# Altium PCB louderspker_pcb_ver1.1.PcbDoc
Units mil, origin at the board's own origin, x right, y up, seen from the top; angles counter-clockwise.
Board outline 2170 x 1830 mil, 2 copper layers (Top Layer, Bottom Layer); 27 components, 16 nets, 65 pads, 6 vias.
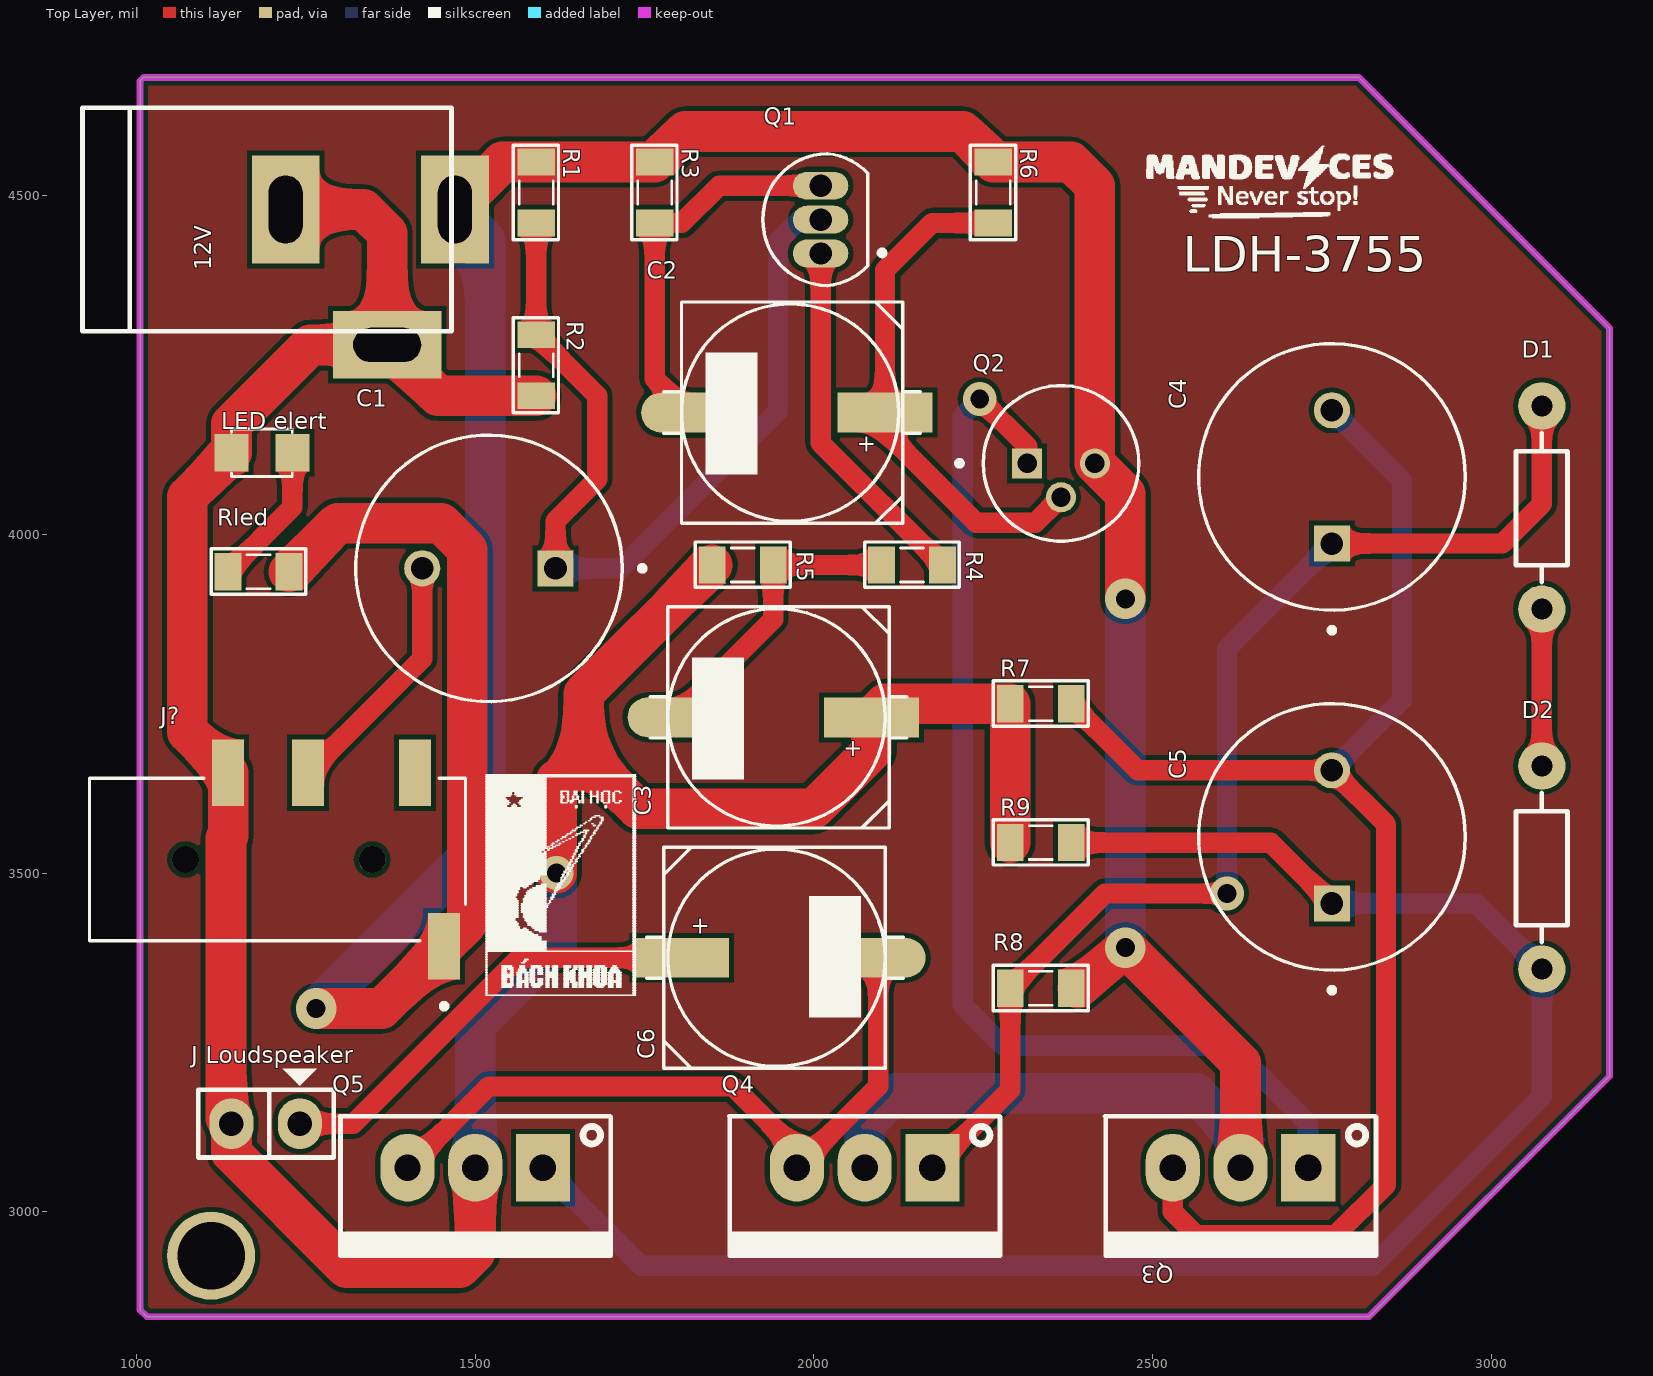
[diagram p0: Top Layer view]
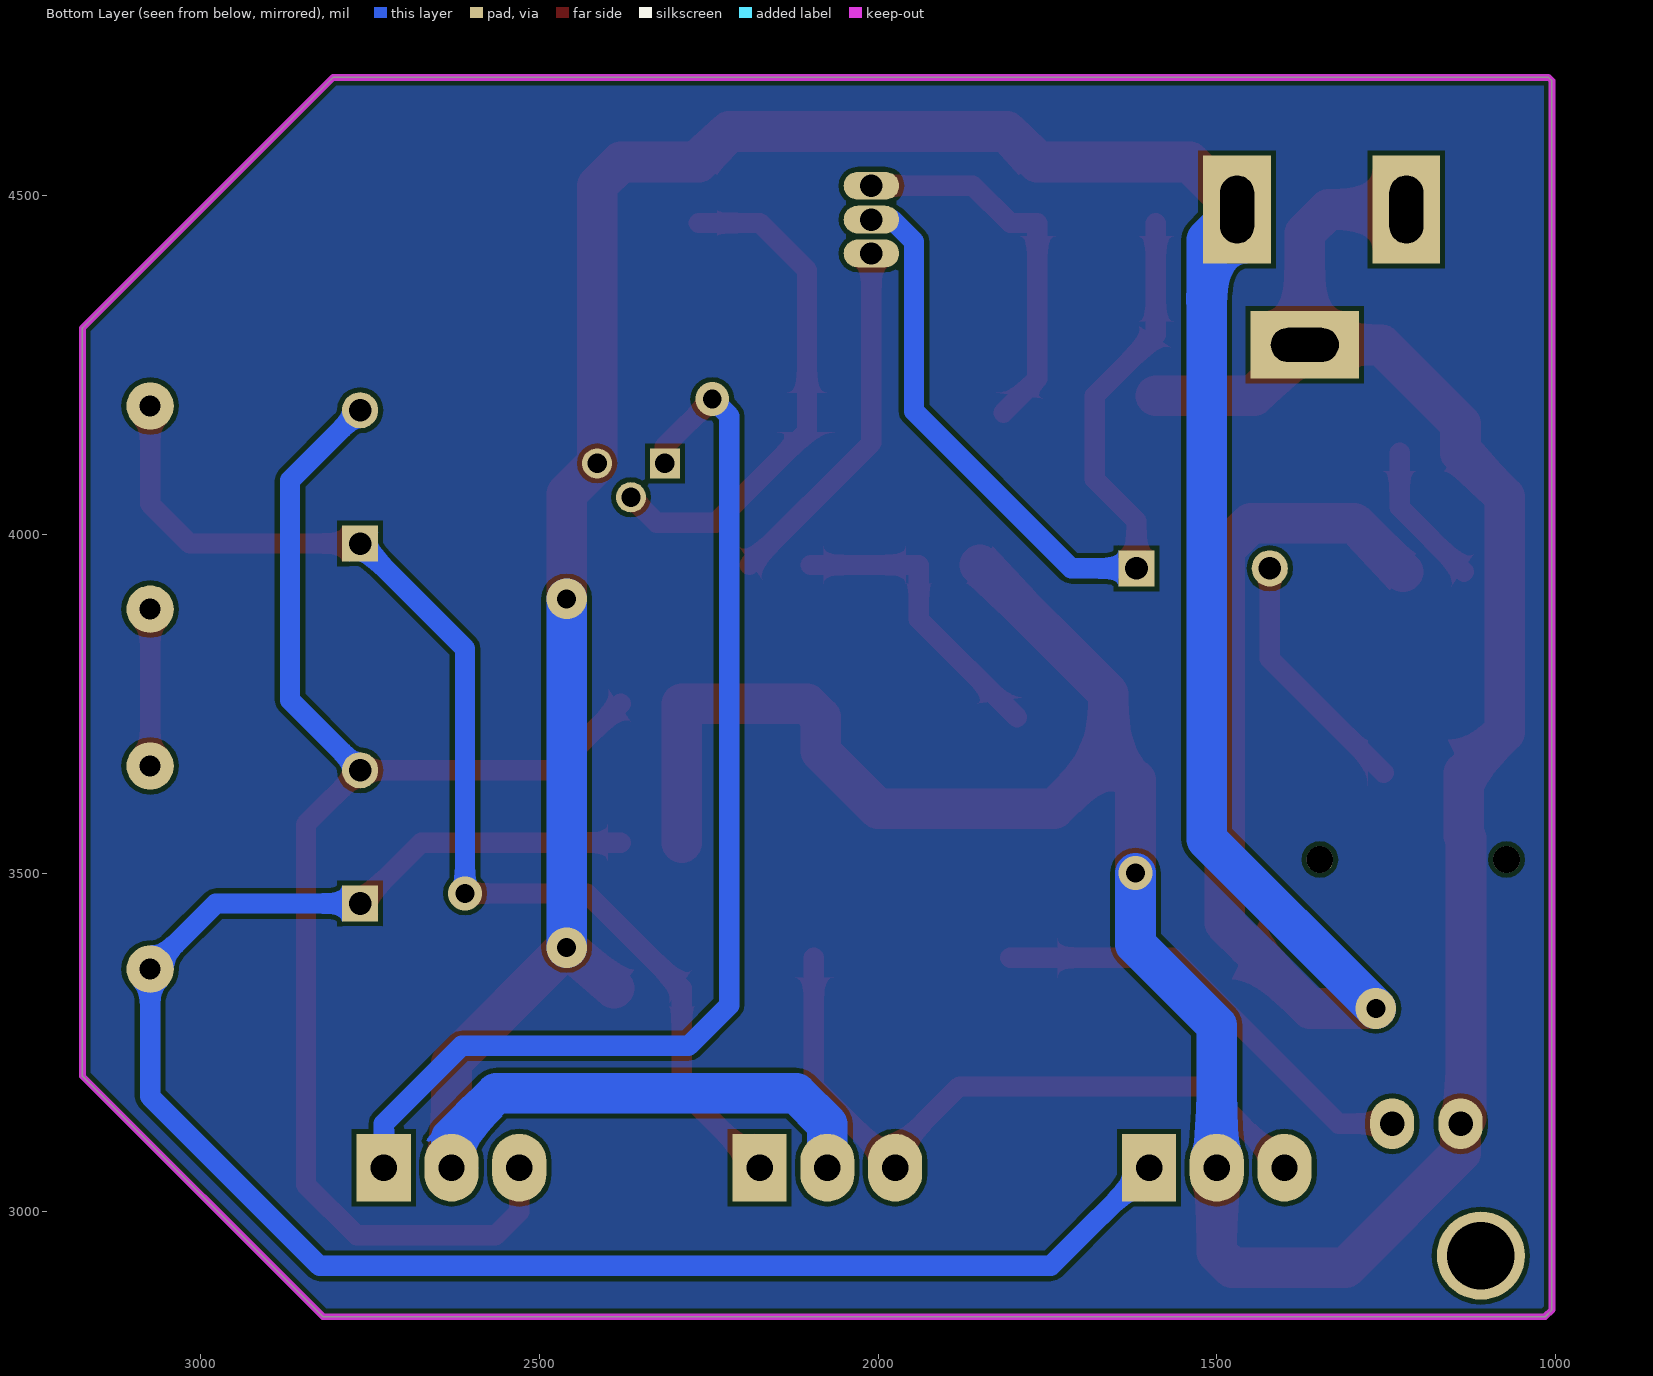
[diagram p1: Bottom Layer view, seen from below]
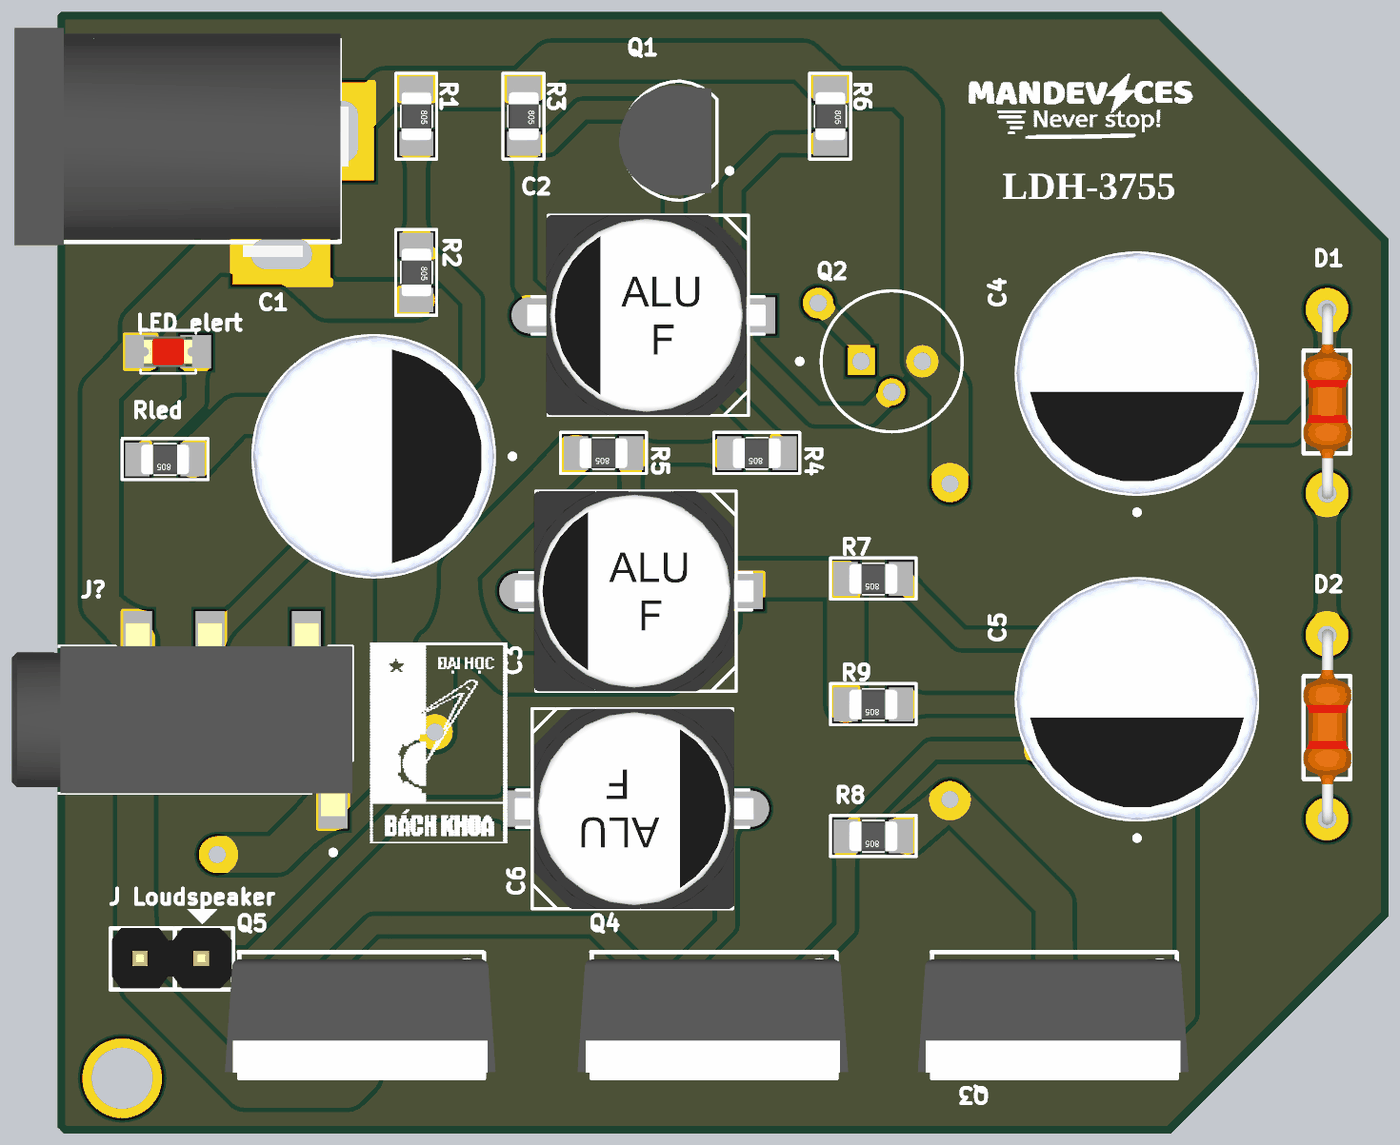
[diagram p2: 3D render of the assembled board from above, using the file's embedded part models]

## Layer stack, top to bottom
Top Solder: solder mask 0.4, Solder Resist, Dk 3.5
Top Layer: signal copper 1.4
Dielectric 1: dielectric 12.6, FR-4, Dk 4.8
Bottom Layer: signal copper 1.4
Bottom Solder: solder mask 0.4, Solder Resist, Dk 3.5

## Board outline
1015,2845 1005,2855 1005,4670 1010,4675 2805,4675 3045,4435 3175,4305 3175,3200 2820,2845

## Design rules (kind name [scope] priority, off if disabled: settings)
Clearance [All] p1: gap=7 ignorepadtopadclearanceinfootprint=TRUE
PolygonConnect [All] p1: connectstyle=Relief reliefconductorwidth=10 reliefentries=4 polygonreliefangle="90 Angle" airgapwidth=10
RoutingVias [All] p1: holewidth=28 width=50 viastyle="Through Hole" minholewidth=28 minwidth=50 maxholewidth=28 maxwidth=50
SolderMaskExpansion [All] p1: expansion=4
Width [All] p1: maxlimit=60 minlimit=20 preferedwidth=30
30 further rules are at their usual default settings.

## Components (designator, comment, footprint, x,y, rotation, side; value= is the part's Value field where it differs from the comment)
12V "Jac DC" DC-IN 1345,4380 r0 top
C1 "CAP-ALU-DIP" CAPPRD500W60D1000H1050 1520.18,3950 r180 top value=104
C2 "CN-ALU-SMD" CAP-ALU-SMD-F 1965,4180 r180 top
C3 "CN-ALU-SMD" CAP-ALU-SMD-F 1945,3730 r180 top
C4 "CAP-ALU-DIP" CAPPRD500W60D1000H1050 2765,4085 r90 top value=104
C5 "CAP-ALU-DIP" CAPPRD500W60D1000H1050 2765,3553.43 r90 top value=104
C6 "CN-ALU-SMD" CAP-ALU-SMD-F 1945,3375 r0 top
D1 "1N4148" RES-1/8W 3075,4034.75 r90 top value="R1/4W - 1K"
D2 "1N4148" RES-1/8W 3075,3503.17 r90 top value="R1/4W - 1K"
"J Loudspeaker" "Jumper 2" JP2 1241,3130 r180 top value="JP 2"
J? "PJ-320D-A" HRO_PJ-320D-A 1210,3520 r0 top
"LED elert" "LED" LED-0805-Red 1230,4120.68 r180 top value="LED 3 ly Single Colour"
Q1 "2N3904" TO92127P495H495-3 2010,4465 r90 top
Q2 "2N2222A" TO127P584H533-3 2365,4105 r0 top
Q3 "TIP41C" QTO-220 2730,3065 r180 top
Q4 "TIP41C" QTO-220 2175,3065 r180 top
Q5 "TIP42C" QTO-220 1600,3065 r180 top
R1 "" RES-SMD-0805 1590,4505 r270 top
R2 "Resistor - SMD" RES-SMD-0805 1590,4250 r270 top
R3 "Resistor - SMD" RES-SMD-0805 1765,4505 r270 top
R4 "Resistor - SMD" RES-SMD-0805 2145,3955 r180 top
R5 "Resistor - SMD" RES-SMD-0805 1895,3955 r180 top
R6 "270k Ohm" RES-SMD-0805 2265,4505 r270 top
R7 "Resistor - SMD" RES-SMD-0805 2335,3750 r180 top
R8 "Resistor - SMD" RES-SMD-0805 2335,3330 r180 top
R9 "Resistor - SMD" RES-SMD-0805 2335,3545 r180 top
Rled "800 Ohm" RES-SMD-0805 1180,3945 r180 top

## Footprints (in the part's own frame and the unit in brackets; to place one, negate y for a bottom-side part, rotate by r counter-clockwise, add the part's x,y. Pads: shape width x height; smd on the part's side, far side on the other; paste and mask are expansions set on the pad)
CAP-ALU-SMD-F [mil]
  rect 140x59.06 smd: 1(-140,0)
  oval 140x59.06 smd: 2(150,0)
  silkscreen extent -192,-163 187,163, body extent -195,-163 195,163, height 402
CAPPRD500W60D1000H1050 [mm]
  rect 1.358x1.358 / inner round 1.358 / far side rect 1.358x1.358 hole 0.85: 1(-2.5,0)
  round 1.358 hole 0.85: 2(2.5,0)
  silkscreen extent -5.85,-5 5,5, body extent -5,-5 5,5, height 9.5
DC-IN [mil]
  rect 100x160 hole 50 slot 100 at 90 deg: 1(125,100) 2(-125,100)
  rect 160x100 hole 50 slot 100 at 0 deg: 3(25,-100)
  silkscreen extent -425,-80 120,250, body extent -410,-105 134,269, height 434
HRO_PJ-320D-A [mm]
  rect 1.2x2.5 smd: 1(6.2,-3.25) 2(5.1,3.25) 3(1.1,3.25) 4(-1.9,3.25)
  round 1 hole 1 unplated: ""(-3.5,0) ""(3.5,0)
  silkscreen extent -7.1,-5.6 7,3.05, body extent -7.1,-4 7,4, height 5.3
JP2 [mil]
  oval 65x75 hole 36: 1(0,0) 2(101,0)
  silkscreen extent -50,-81 150,50, body extent -48,-50 148,48, height 323
LED-0805-Red [mil]
  rect 50x55 smd: 1(0,0) 2(90,0)
  silkscreen extent 0,-35 90,35, body extent 5,-25 85,25, height 43
QTO-220 [mil]
  rect 80x100 hole 39: 1(0,0)
  oval 80x100 hole 39: 2(100,0) 3(200,0)
  silkscreen extent -100,-76 300,130, body extent -119,-64 322,121, height 755
RES-1/8W [mil]
  round 70 hole 31: 1(-145,0) 2(155,0)
  silkscreen extent -105,-38 115,38, body extent -154,-40 164,39, height 79
RES-SMD-0805 [mil]
  rect 39.37x55 smd: 1(-45,0) 2(45,0)
  silkscreen extent -70,-34 70,33, body extent -39,-25 39,25, height 31
TO127P584H533-3 [mm]
  rect 1.13x1.13 hole 0.73: 1(-1.27,0)
  round 1.13 hole 0.73: 2(0,-1.27) 3(1.27,0)
  silkscreen extent -3.91,-2.92 2.92,2.92
TO92127P495H495-3 [mm]
  oval 1.04x2.08 hole 0.84: 1(-1.27,0) 2(0,0) 3(1.27,0)
  silkscreen extent -2.48,-2.4 2.48,2.16, body extent -2.28,-1.55 2.28,2.28, height 20.44

## Part data
12V: library part DCIN, "Jac DC input"
C1 C4 C5: "Capacitor (Semiconductor SIM Model)", LatestRevisionDate=17-Jul-2002, LatestRevisionNote="Re-released for DXP Platform.", PackageReference=C1206, Publisher="Altium Limited"
C2 C3 C6: library part CAP-ALU-SMD, "Polarized Capacitor (Axial)", LatestRevisionDate=17-Jul-2002, LatestRevisionNote="Re-released for DXP Platform.", PackageReference=POLAR0.8, Published=8-Jun-2000, Publisher="Altium Limited"
D1 D2: library part "Resistor - DIP", "Resistor - DIP"
"J Loudspeaker": library part "JP 2"
J?: "Headphone jack 0.5A 30V DC 100 mΩ", Package=Package, Availability="Not in stock", Check_prices=https://www.snapeda.com/parts/PJ-320D-A/HRO+Electronics+Co.%252C+Ltd./view-part/?ref=eda, MF="HRO Electronics Co., Ltd.", MP=PJ-320D-A, Price=None, SnapEDA_Link=https://www.snapeda.com/parts/PJ-320D-A/HRO+Electronics+Co.%252C+Ltd./view-part/?ref=snap
"LED elert": "LED Single colour Green and Red"
Q1: "TRANS NPN 40V 200MA TO92-3", Package="TO-226-3 Rectron", Availability="In Stock", Check_prices=https://www.snapeda.com/parts/2N3904/Rectron/view-part/?ref=eda, MF=Rectron, MP=2N3904, Price=None, Purchase-URL=https://pricing.snapeda.com/search/part/2N3904/?ref=eda, SnapEDA_Link=https://www.snapeda.com/parts/2N3904/Rectron/view-part/?ref=snap
Q2: "2N2222A 50 V 800 mA NPN Silicon Switching Transistor - TO-18 (TO-206AA)", Package=None, Availability=Unavailable, MP=2N2222A, Price=None
Q3 Q4: "NPN 2W, BCE", =H1061
Q5: "PNP 2W, BCE", =A671
R1 R6 Rled: library part "Resistor - SMD", "Resistor SMD", Manufacturer="Generic Components", Class=Passive, Published=08/06/2000, Publisher="Altium Hobart Technology Centre"
R2 R3 R4 R5 R7 R8 R9: "Resistor SMD", Manufacturer="Generic Components", Class=Passive, Published=08/06/2000, Publisher="Altium Hobart Technology Centre"

## Free pads (board coordinates)
  round 130 hole 100: 2(1110,2935)

## Via types
v1: diameter 50, hole 28, Top Layer to Bottom Layer, 3 vias
v2: diameter 60, hole 28, Top Layer to Bottom Layer, 3 vias

## Nets (pads, with @x,y where several pads share a name; then routed paths per layer and width w, separated by ;. In a path a pad name is that pad's centre, name@x,y a point inside that pad or via, vN(x,y) a via of type N, cw(c..) or ccw(c..) an arc to the next point about the centre after c; other vN are vias at no path point)
+12: 12V.1 J?.1 Q2.3 Q3.2 Q4.2 R1.1 R3.1 R6.1 R8.1 Rled.1 | length 5815
  Top Layer w30: R8.1 R8.1@2390,3330
  Top Layer w60: Rled.1 1296.73,4016.73 1449.39,4016.73 1488.48,3977.64 1488.48,3426.44 J?.1 1362.05,3300 v2(1265,3300) ; 12V.1 1540,4550 R1.1 R3.1 1810,4595 2220,4595 R6.1 2380,4550 2415,4515 Q2.3 2460,4060 v2(2460,3905) ; R8.1@2390,3330 v2(2460,3390) 2630,3220 Q3.2
  Bottom Layer w60: v2(1265,3300) 1515,3550 1515,4435 12V.1 ; Q4.2 2075,3129 2121,3175 2563.95,3175 2630,3108.95 Q3.2 ; v2(2460,3390) v2(2460,3905)
GND: 12V.2 12V.3 "J Loudspeaker.2" "LED elert.2" C3.1 J?.4 Q5.2 R2.2 R5.2 R7.2 R9.2 | length 4554.7
  Top Layer w60: 12V.2 1335,4480 1370,4445 12V.3 ; Q5.2 1500,2940 1477,2917 1310,2917 1140,3087 1140,3130 1131.89,3138.11 1131.89,3551.61 1135.2,3554.92 J?.4 1075,3708.15 1075,4055.68 1140,4120.68 1140,4163.18 1256.82,4280 12V.3 ; R2.2 1445,4205 12V.3 ; v1(1620,3500) 1620,3637.5 1622.5,3637.5 1660,3675 ; R5.2 1660,3765 1660,3675 ; R9.2 R7.2 2105,3750 C3.1 2085,3680 2000,3595 1740,3595 1660,3675
  Bottom Layer w60: Q5.2 1500,3275 1620,3395 v1(1620,3500)
NetC1_1: C1.1 Q1.2 R1.2 R2.1 | length 1324.2
  Top Layer w30: R1.2 R2.1 1680,4205 1680,4081.4 1618.6,4020 C1.1
  Bottom Layer w30: C1.1 1715,3950 1947.06,4182.06 1947.06,4432.59 1979.46,4465 Q1.2
NetC1_2: C1.2 J?.3 | length 371.8
  Top Layer w30: J?.3 1421.75,3816.4 C1.2
NetC2_1: C2.1 Q2.2 R6.2 | length 758.4
  Top Layer w30: R6.2 2175,4460 2105,4390 C2.1 2105,4152.2 2240,4017.2 2327.2,4017.2 Q2.2
NetC2_2: C2.2 Q1.3 R3.2 | length 568.5
  Top Layer w30: C2.2 1765,4230 R3.2 1805,4460 1860,4515 Q1.3
NetC3_2: C3.2 R4.2 R5.1 | length 445.1
  Top Layer w30: C3.2 1940,3875 R5.1 R4.2
NetC4_1: C4.1 D1.2 Q4.1 R8.2 | length 1750.3
  Top Layer w30: Q4.1 2290,3180 R8.2 2430,3470 v1(2610,3470) ; C4.1 3016.57,3986.57 3075,4045 D1.2
  Bottom Layer w30: v1(2610,3470) 2610,3831.57 C4.1
NetC4_2: C4.2 C5.2 Q3.3 R7.1 | length 2113.5
  Top Layer w30: R7.1 2478.15,3651.85 C5.2 2845,3571.85 2845,3040 2770,2965 2565,2965 2530,3000 Q3.3
  Bottom Layer w30: C5.2 2868.43,3755.28 2868.43,4080 C4.2
NetC5_1: C5.1 D2.1 Q5.1 R9.1 | length 2599.2
  Top Layer w30: R9.1 2675,3545 C5.1
  Bottom Layer w30: Q5.1 1745,2920 2825,2920 3075,3170 D2.1 2978.17,3455 C5.1
NetC6_1: "J Loudspeaker.1" C6.1 | length 665.5
  Top Layer w30: 1241,3130 1320,3130 1565,3375 C6.1
NetC6_2: C6.2 Q4.3 Q5.3 | length 1041.4
  Top Layer w30: Q5.3 1520,3185 1880,3185 Q4.3@1987.5,3077.5 ; Q4.3 Q4.3@1987.5,3077.5 ; C6.2 2095,3185 Q4.3@1987.5,3077.5
NetD1_1: D1.1 D2.2 | length 231.6
  Top Layer w30: D2.2 D1.1
"NetLED elert_1": "LED elert.1" Rled.2 | length 215
  Top Layer w30: Rled.2 1230,4040 1230,4120.68
NetQ1_1: Q1.1 R4.1 | length 534.6
  Top Layer w30: Q1.1 2010,4135 R4.1
NetQ2_1: Q2.1 Q3.1 | length 1646.8
  Top Layer w30: v1(2245,4200) 2315,4130 Q2.1
  Bottom Layer w30: v1(2245,4200) 2220,4175 2220,3305 2280,3245 2615,3245 2730,3130 Q3.1@2730,3095
pads on no net: J?. J?.2

## Polygon pours and split planes (outlines as drawn)
no net on Top Layer "Top Layer-No Net 1" (solid, pour order 12): 1015,4675
no net on Top Layer "Top Layer-No Net 2" (solid, pour order 10): 1005,4670 1010,4675 1015,4670 2810,4670 3175,4305 3175,3200 2820,2845 1015,2845 1005,2855
no net on Top Layer "Top Layer-No Net 3" (solid, pour order 8): 3060,4735
no net on Top Layer "Top Layer-No Net 4" (solid, pour order 6): 3080,4740
no net on Top Layer "Top Layer-No Net" (solid, pour order 0): 1005,4755
no net on Bottom Layer "Bottom Layer-No Net" (solid, pour order 14): 1010,4675 2805,4675 3175,4305 3175,3200 2820,2845 1015,2845 1005,2855 1005,4670

## Keep-outs
Keep-Out Layer:
  lines w10: 1005,2855 1015,2845 2820,2845 3175,3200 3175,4305 3045,4435 2805,4675 2340,4675 2335,4675 1010,4675 1005,4670 1005,2855

## Other copper
Top Layer:
  pour cut-out: 1000,4700

## Silkscreen, mask and mechanical layers (free items; w line width, h text height)
Top Overlay:
  drawing of 1603 lines, arcs and shapes, not listed
  text "LDH-3755" at 2545,4370 h90

## Text inside footprints (layer, text, board x,y; h text height)
C2: Top Overlay "+" at 2091.97,4144.57 h25 r180
C3: Top Overlay "+" at 2071.97,3694.57 h25 r180
C6: Top Overlay "+" at 1818.03,3410.43 h25